# Altium PCB PCB1.pcbdoc (part 2 of 3)
Units mil, origin at the board's own origin, x right, y up, seen from the top; angles counter-clockwise.
Board outline 3735 x 4815 mil, 4 copper layers (Top Layer, Inner1, Inner2, Bottom Layer); 129 components, 135 nets, 714 pads, 315 vias.
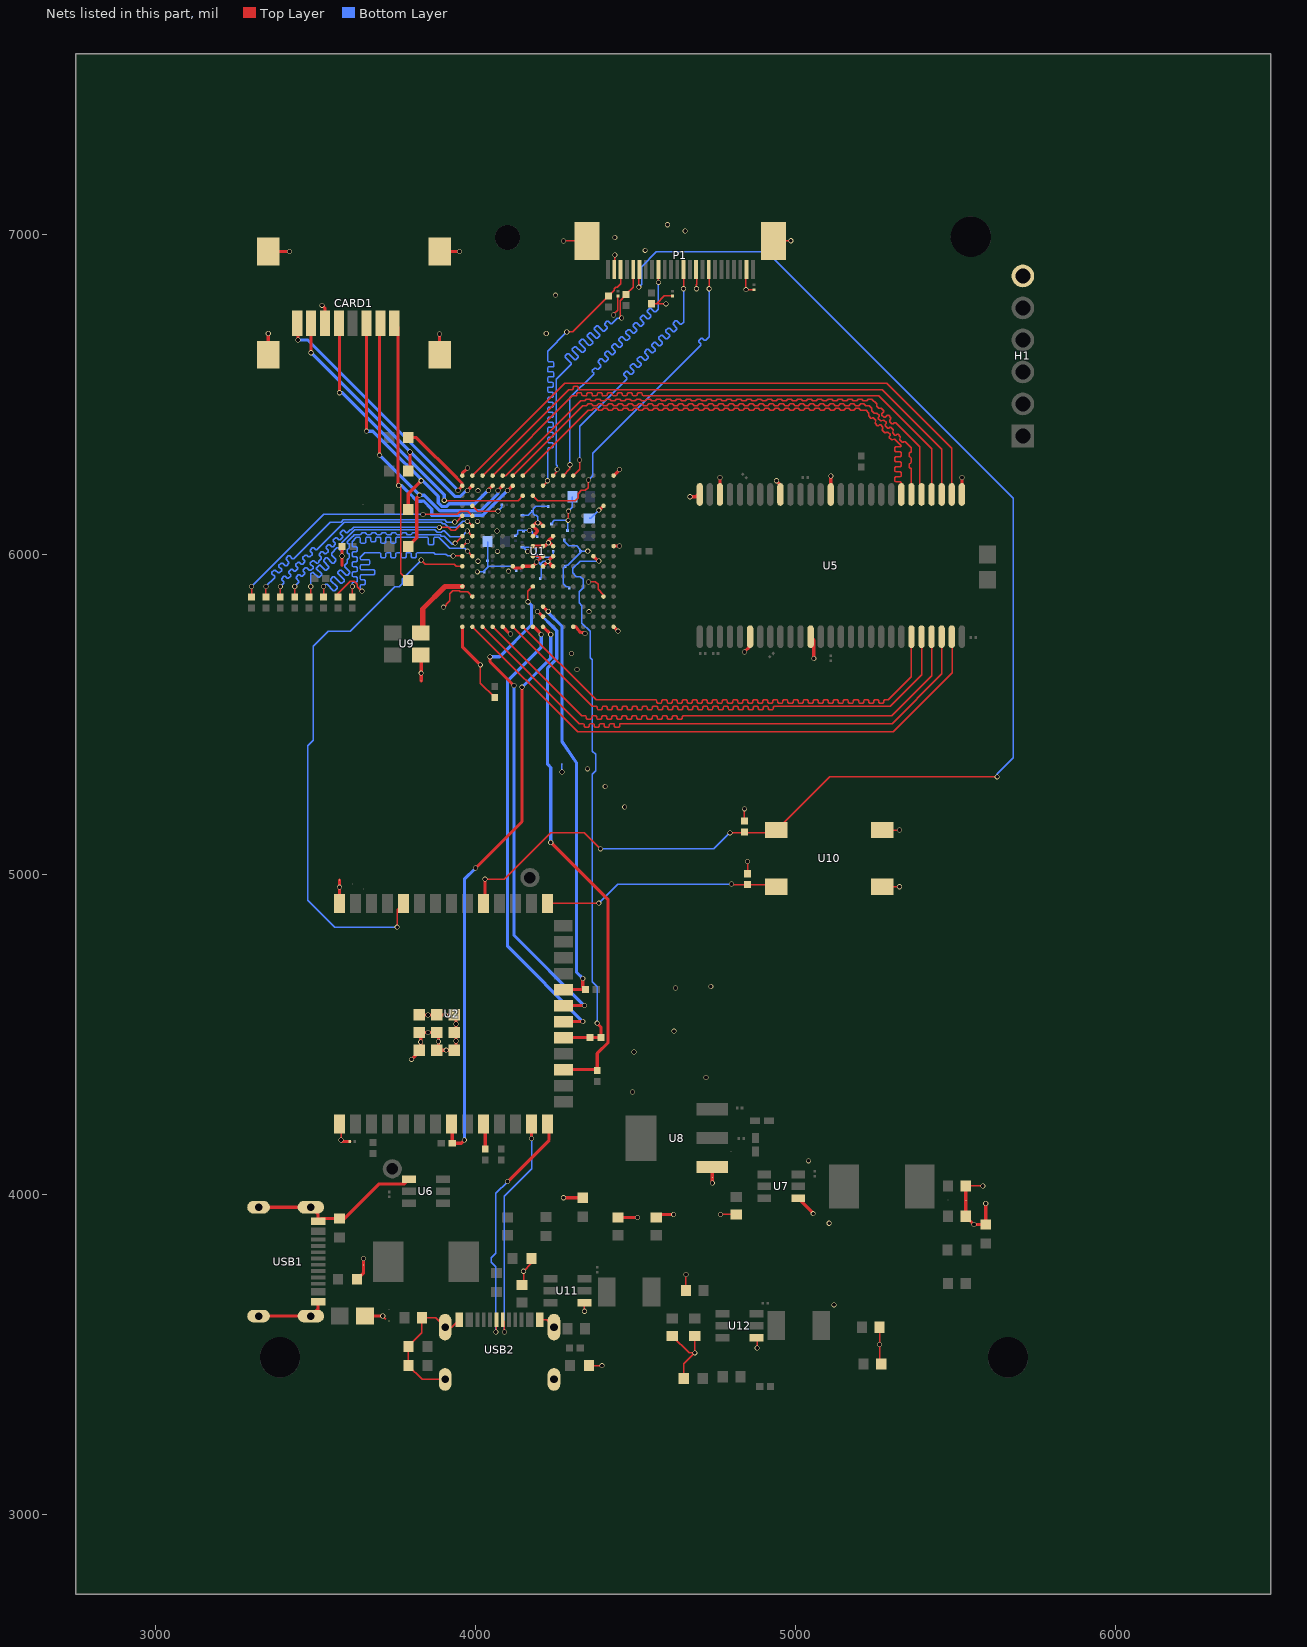
[diagram p4: the nets of this part, all layers, seen from the top]

## Via types
v1: diameter 15.75, hole 11.81, Top Layer to Bottom Layer, 309 vias
v2: diameter 39.37, hole 19.68, Top Layer to Bottom Layer, 6 vias

## Nets (pads, with @x,y where several pads share a name; then routed paths per layer and width w, separated by ;. In a path a pad name is that pad's centre, name@x,y a point inside that pad or via, vN(x,y) a via of type N, cw(c..) or ccw(c..) an arc to the next point about the centre after c; other vN are vias at no path point) (continued)
CCLK: R6.1 R6.2 U1.J14 U2.19 | length 1754.5
  Top Layer w10: U2.19@4280.19,4490 R6.1@4357.96,4490 R6.2@4392.04,4490 4392.04,4522.96 v1(4380,4535) ; U1.J14@4368.23,5994.25 4383.31,5979.17 v1(4385,5979.17)
  Bottom Layer w3.94: v1(4380,4535) 4380,4648.33 4364.17,4664.16 4364.17,5312.67 4375,5323.5 4375,5375 4365,5385 4364.17,5385 4364.17,5670.83 4358.19,5676.81 4358.19,5759.56 4332.26,5785.48 4332.26,5839.22 4323.27,5848.21 4323.27,5883.27 4335.83,5895.83 4335.83,5921.56 4326.56,5930.83 4315.31,5930.83 4304.11,5942.03 4304.11,5956.49 4326.79,5979.17 v1(4385,5979.17)
CRYSTAL: U1.M1 U9.3 | length 231
  Top Layer w15.75: U9.3@3828.31,5754.45 3835,5761.14 3835,5830 3904.76,5899.76 U1.M1@3958.78,5899.76
D0: R26.1 U1.E2 | length 827.3
  Top Layer w3.94: R26.1@3300,5867.04 v1(3300,5900) ; v1@3835,6125 3942.27,6125 3952.55,6135.28 3975.24,6135.28 U1.E2@3990.28,6120.24
  Bottom Layer w3.94: v1(3300,5900) 3525,6125 v1(3835.38,6125)
D1: R27.1 U1.E1 | length 830.3
  Top Layer w3.94: R27.1@3345,5867.04 v1(3345,5900) ; v1(3935,6101.14) 3939.68,6101.14 U1.E1@3958.78,6120.24
  Bottom Layer w3.94: v1(3345,5900) 3371.97,5926.97 3371.97,5930.91 3363.41,5939.47 3363.41,5943.41 3370.6,5950.6 3374.54,5950.6 3383.1,5942.04 3387.04,5942.04 3394.24,5949.24 3394.24,5953.18 3385.68,5961.74 3385.68,5965.68 3392.88,5972.88 3396.81,5972.88 3405.38,5964.31 3409.31,5964.31 3416.51,5971.51 3416.51,5975.45 3407.95,5984.01 3407.95,5987.95 3415.15,5995.15 3419.08,5995.15 3427.65,5986.58 3431.58,5986.58 3546.14,6101.14 3580.01,6101.14 3587.01,6108.15 3903.22,6108.15 3910.23,6101.14 v1(3935,6101.14)
D2: R28.1 U1.F2 | length 844.7
  Top Layer w3.94: R28.1@3390,5867.04 v1(3390,5900) ; v1(3974.88,6103.3) 3975.72,6103.3 U1.F2@3990.28,6088.74
  Bottom Layer w3.94: v1(3390,5900) 3400,5910 3400,5913.94 3393.94,5920 3393.94,5923.94 3401.14,5931.14 3405.07,5931.14 3411.14,5925.07 3415.07,5925.07 3422.27,5932.27 3422.27,5936.21 3416.21,5942.27 3416.21,5946.21 3423.41,5953.41 3427.34,5953.41 3433.41,5947.34 3437.34,5947.34 3444.54,5954.54 3444.54,5958.48 3438.48,5964.54 3438.48,5968.48 3445.68,5975.68 3449.61,5975.68 3455.68,5969.61 3459.61,5969.61 3466.81,5976.81 3466.81,5980.75 3460.75,5986.81 3460.75,5990.75 3467.95,5997.95 3471.89,5997.95 3477.95,5991.89 3481.89,5991.89 3489.08,5999.08 3489.08,6003.02 3483.02,6009.08 3483.02,6013.02 3490.22,6020.22 3494.16,6020.22 3500.22,6014.16 3504.16,6014.16 3590.28,6100.28 3893.32,6100.28 3897.63,6095.97 3904.27,6095.97 3914.92,6085.31 3941.56,6085.31 3959.54,6103.3 v1(3974.88,6103.3)
D3: R29.1 U1.F1 | length 814.7
  Top Layer w3.94: R29.1@3435,5867.04 v1(3435,5900) ; v1(3886.77,6084.45) 3914.31,6084.45 3923.44,6075.31 3936.56,6075.31 3950.65,6089.41 3958.11,6089.41 U1.F1@3958.78,6088.74
  Bottom Layer w3.94: v1(3435,5900) 3447.57,5912.57 3447.57,5916.51 3439.01,5925.07 3439.01,5929.01 3446.21,5936.21 3450.14,5936.21 3454.84,5931.51 3458.78,5931.51 3465.98,5938.71 3465.98,5942.64 3461.28,5947.34 3461.28,5951.28 3468.48,5958.48 3472.41,5958.48 3480.98,5949.91 3484.91,5949.91 3492.11,5957.11 3492.11,5961.05 3483.55,5969.61 3483.55,5973.55 3490.75,5980.75 3494.69,5980.75 3503.25,5972.19 3507.19,5972.19 3509.25,5974.25 3509.25,5978.05 3517.6,5986.4 3517.6,5990.33 3510.94,5997 3510.94,6000.94 3518.14,6008.14 3522.07,6008.14 3528.74,6001.47 3532.68,6001.47 3539.87,6008.67 3539.87,6012.61 3533.21,6019.27 3533.21,6023.21 3540.41,6030.41 3544.34,6030.41 3551.01,6023.74 3554.95,6023.74 3562.15,6030.94 3562.15,6034.88 3555.48,6041.54 3555.48,6045.48 3562.68,6052.68 3566.62,6052.68 3573.28,6046.01 3577.22,6046.01 3584.42,6053.21 3584.42,6057.15 3577.75,6063.81 3577.75,6067.75 3584.95,6074.95 3588.89,6074.95 3595.55,6068.28 3599.49,6068.28 3607.7,6076.5 3611.5,6076.5 3619.45,6084.45 v1(3886.77,6084.45)
D4: R30.1 U1.G2 | length 836.9
  Top Layer w3.94: R30.1@3480,5867.04 3485,5872.04 v1(3485,5900) ; v1(3974.28,6073.12) 3974.4,6073.12 U1.G2@3990.28,6057.24
  Bottom Layer w3.94: v1(3485,5900) 3485,5938.86 3490.76,5944.62 3491.47,5944.62 3507.68,5928.4 3511.62,5928.4 3518.82,5935.6 3518.82,5939.54 3502.6,5955.76 3502.6,5956.47 3513.03,5966.89 3513.74,5966.89 3529.95,5950.68 3533.89,5950.68 3541.09,5957.87 3541.09,5961.81 3524.87,5978.03 3524.87,5981.96 3532.07,5989.16 3536.01,5989.16 3552.23,5972.95 3556.16,5972.95 3563.36,5980.15 3563.36,5984.08 3550,5997.44 3550,6003.86 3566.76,6020.62 3570.7,6020.62 3579.29,6012.03 3583.23,6012.03 3590.42,6019.23 3590.42,6023.17 3581.83,6031.76 3581.83,6035.7 3622.71,6076.57 3872.26,6076.57 3880.21,6068.62 3893.32,6068.62 3898.32,6073.62 3902.59,6073.62 3920.39,6055.83 3956.99,6055.83 v1(3974.28,6073.12)
D5: R31.1 U1.G1 | length 826
  Top Layer w3.94: R31.1@3525,5867.04 v1(3525,5900) ; v1(3936.32,6035) 3936.54,6035 U1.G1@3958.78,6057.24
  Bottom Layer w3.94: v1(3525,5900) 3532.04,5907.04 3535.98,5907.04 3556.02,5887 3559.95,5887 3567.15,5894.2 3567.15,5898.13 3547.11,5918.17 3547.11,5922.11 3554.31,5929.31 3558.25,5929.31 3578.29,5909.27 3582.23,5909.27 3589.42,5916.47 3589.42,5920.4 3569.38,5940.45 3569.38,5944.38 3575.82,5950.82 3579.76,5950.82 3595.99,5934.59 3599.93,5934.59 3607.13,5941.79 3607.13,5945.73 3590.9,5961.96 3590.9,5965.9 3598.79,5973.79 3598.79,5983.93 3601.57,5986.71 3603.19,5986.71 3605.97,5989.49 3605.97,5999.67 3603.19,6002.46 3601.57,6002.46 3598.79,6005.24 3598.79,6015.42 3601.57,6018.21 3603.19,6018.21 3605.97,6020.99 3605.97,6031.17 3603.19,6033.95 3601.57,6033.95 3598.79,6036.74 3598.79,6039.63 3616.35,6057.2 3617.2,6057.2 3620.75,6060.75 3639.86,6060.75 3642.64,6063.53 3642.64,6064.76 3645.43,6067.55 3655.61,6067.55 3658.39,6064.76 3658.39,6063.53 3661.17,6060.75 3671.35,6060.75 3674.14,6063.53 3674.14,6064.76 3676.92,6067.55 3687.1,6067.55 3689.89,6064.76 3689.89,6063.53 3692.67,6060.75 3702.85,6060.75 3705.63,6063.53 3705.63,6064.76 3708.42,6067.55 3718.6,6067.55 3721.38,6064.76 3721.38,6063.53 3724.17,6060.75 3734.35,6060.75 3737.13,6063.53 3737.13,6064.76 3739.91,6067.55 3750.1,6067.55 3752.88,6064.76 3752.88,6063.53 3755.66,6060.75 3765.84,6060.75 3768.63,6063.53 3768.63,6064.76 3771.41,6067.55 3781.59,6067.55 3784.38,6064.76 3784.38,6063.53 3787.16,6060.75 3797.34,6060.75 3800.12,6063.53 3800.12,6064.76 3802.91,6067.55 3813.09,6067.55 3815.87,6064.76 3815.87,6063.53 3818.66,6060.75 3888.91,6060.75 3892.46,6057.2 3901.46,6057.2 3927.21,6031.45 3932.78,6031.45 v1(3936.32,6035)
D6: R32.1 U1.J1 | length 823.8
  Top Layer w3.94: R32.1@3570,5867.04 3570,5877.38 3608.44,5915.83 3621.56,5915.83 3630.83,5906.56 3630.83,5899.17 v1(3645,5885) ; v1(3930,5995) 3958.03,5995 U1.J1@3958.78,5994.25
  Bottom Layer w3.94: v1(3645,5885) 3639.17,5890.83 3639.17,5902.01 3641.96,5904.79 3652.36,5904.79 3655.15,5907.58 3655.15,5917.76 3652.36,5920.54 3641.96,5920.54 3639.17,5923.32 3639.17,5933.5 3641.96,5936.29 3682.22,5936.29 3685,5939.07 3685,5949.25 3682.22,5952.04 3641.96,5952.04 3639.17,5954.82 3639.17,5965 3641.96,5967.78 3667.2,5967.78 3669.99,5970.57 3669.99,5980.75 3667.2,5983.53 3641.96,5983.53 3639.17,5986.32 3639.17,5991.56 3653.44,6005.83 3701.38,6005.83 3704.16,6003.04 3704.16,5992.78 3706.94,5990 3717.12,5990 3719.91,5992.78 3719.91,6003.04 3722.69,6005.83 3732.87,6005.83 3735.66,6003.04 3735.66,5992.78 3738.44,5990 3748.62,5990 3751.4,5992.78 3751.4,6003.04 3754.19,6005.83 3764.37,6005.83 3767.15,6003.04 3767.15,5992.78 3769.94,5990 3780.12,5990 3782.9,5992.78 3782.9,6003.04 3785.68,6005.83 3795.86,6005.83 3798.65,6003.04 3798.65,5992.78 3801.43,5990 3811.61,5990 3814.4,5992.78 3814.4,6003.04 3817.18,6005.83 3869.17,6005.83 3874.17,6000.83 3906.56,6000.83 3912.38,5995 v1(3930,5995)
D7: R34.1 U1.J2 | length 826.3
  Top Layer w3.94: R34.1@3615,5867.04 v1(3615,5900) ; v1(3975,6010) 3975,6009.53 U1.J2@3990.28,5994.25
  Bottom Layer w3.94: v1(3615,5900) 3615,5910.8 3617.78,5913.58 3627.36,5913.58 3630.15,5916.36 3630.15,5926.54 3627.36,5929.33 3617.78,5929.33 3615,5932.11 3615,5942.29 3617.78,5945.08 3627.36,5945.08 3630.15,5947.86 3630.15,5958.04 3627.36,5960.82 3617.78,5960.82 3615,5963.61 3615,5973.79 3617.78,5976.57 3627.36,5976.57 3630.15,5979.36 3630.15,5989.54 3627.36,5992.32 3617.78,5992.32 3615,5995.1 3615,6005.29 3617.78,6008.07 3627.36,6008.07 3630.15,6010.85 3630.15,6021.03 3627.36,6023.82 3617.78,6023.82 3615,6026.6 3615,6040 3627.87,6052.87 3637.66,6052.87 3640.45,6050.09 3640.45,6036.77 3643.23,6033.99 3653.41,6033.99 3656.19,6036.77 3656.19,6050.09 3658.98,6052.87 3669.16,6052.87 3671.94,6050.09 3671.94,6042.34 3674.73,6039.56 3684.91,6039.56 3687.69,6042.34 3687.69,6050.09 3690.47,6052.87 3700.65,6052.87 3703.44,6050.09 3703.44,6036.77 3706.22,6033.99 3716.4,6033.99 3719.19,6036.77 3719.19,6050.09 3721.97,6052.87 3732.15,6052.87 3734.93,6050.09 3734.93,6036.77 3737.72,6033.99 3747.9,6033.99 3750.68,6036.77 3750.68,6050.09 3753.47,6052.87 3850.06,6052.87 3852.85,6050.09 3852.85,6032.78 3855.63,6030 3865.81,6030 3868.59,6032.78 3868.59,6050.09 3871.38,6052.87 3885.65,6052.87 3919.35,6019.17 3965.83,6019.17 v1(3975,6010)
DIN: U1.T8 U2.20 | length 1441.2
  Top Layer w10: U1.T8@4179.25,5773.78 4181.22,5773.78 v1(4205,5750) ; U2.20@4280.19,4540 v1(4335,4540)
  Bottom Layer w10: v1(4205,5750) 4205,5710 4100,5605 4100,4775 v1(4335,4540)
DN: U2.13 USB2.A7 | length 727.9
  Top Layer w3.94: USB2.A7@4084.84,3608.01 4090,3602.85 v1(4090,3570)
  Top Layer w10: v1(4175,4175) 4175,4215.7 U2.13@4179.81,4220.51
  Bottom Layer w3.94: v1(4090,3570) 4090,3995 4175,4080 v1(4175,4175)
DONE: pad.55@4295,5375 R3.2 U1.P9 U2.22 | length 1310.8
  Top Layer w10: U1.P9@4210.75,5836.77 4225.33,5822.19 v1(4227.19,5822.19) ; U2.22@4280.19,4640 R3.2@4342.96,4640 4335,4647.96 v1(4335,4675)
  Bottom Layer w10: v1(4227.19,5822.19) 4227.19,5817.81 4270,5775 4270,5415 4315,5350 4315,4695 v1(4335,4675)
DOUT: U1.M8 U2.21 | length 1574.2
  Top Layer w3.94: v1(4163.51,5851.94) 4163.51,5884.02 U1.M8@4179.25,5899.76
  Top Layer w10: v1(4045,5680) 4045,5665 v1(4120,5590) ; U2.21@4280.19,4590 v1(4340,4590)
  Bottom Layer w10: v1(4045,5680) 4075,5680 4174.69,5779.69 4174.69,5840.76 v1(4163.51,5851.94) ; v1(4120,5590) 4120,4810 v1(4340,4590)
DP: U2.14 USB2.A6 | length 769.2
  Top Layer w3.94: v1@4065.16,3570 USB2.A6@4065.16,3608.01
  Top Layer w10: v1(4100,4040) 4229.81,4169.81 U2.14@4229.81,4220.51
  Bottom Layer w3.94: v1(4063.27,3570) 4063.27,3774.35 4049.17,3788.44 4049.17,3801.56 4063.27,3815.65 4063.27,4003.27 v1(4100,4040)
FSCL: P1.5 R39.1 U1.A10 | length 1063.4
  Top Layer w3.94: U1.A10@4242.24,6246.22 4255,6258.98 v1(4255,6265) ; v1(4456.7,6738.3) 4451.42,6743.58 4451.42,6792.39 4470,6810.97 R39.1@4470,6812.04 4492.53,6834.57 P1.5@4492.53,6890.56
  Bottom Layer w3.94: v1(4255,6265) 4255,6276.25 4251.83,6279.42 4251.83,6546.77 4298.64,6593.59 4298.64,6597.53 4280.05,6616.11 4280.05,6620.05 4287.25,6627.25 4291.19,6627.25 4309.78,6608.66 4313.71,6608.66 4320.91,6615.86 4320.91,6619.8 4302.32,6638.39 4302.32,6642.32 4309.52,6649.52 4313.46,6649.52 4332.05,6630.93 4335.98,6630.93 4343.18,6638.13 4343.18,6642.07 4324.59,6660.66 4324.59,6664.59 4331.79,6671.79 4335.73,6671.79 4354.32,6653.2 4358.26,6653.2 4365.45,6660.4 4365.45,6664.34 4348.83,6680.96 4348.83,6684.9 4356.03,6692.1 4359.97,6692.1 4376.59,6675.47 4380.53,6675.47 4387.73,6682.67 4387.73,6686.61 4371.1,6703.23 4371.1,6707.17 4378.3,6714.37 4382.24,6714.37 4398.86,6697.75 4402.8,6697.75 4410.9,6705.84 4410.9,6709.78 4403.42,6717.26 4403.42,6721.19 4410.62,6728.39 4414.55,6728.39 4422.03,6720.92 4425.97,6720.92 4443.35,6738.3 v1(4456.7,6738.3)
FSDA: P1.3 R38.1 U1.B9 | length 1063.6
  Top Layer w3.94: U1.B9@4210.75,6214.72 4225,6228.97 v1(4225,6230) ; v1(4285,6695) 4302.96,6695 R38.1@4415,6807.04 4432.72,6824.76 4432.72,6830.11 4437.38,6834.77 4442.73,6834.77 4453.16,6845.2 P1.3@4453.16,6890.56
  Bottom Layer w3.94: v1(4225,6230) 4225,6330.57 4227.78,6333.35 4240.25,6333.35 4243.03,6336.14 4243.03,6346.32 4240.25,6349.1 4227.78,6349.1 4225,6351.88 4225,6362.48 4227.78,6365.26 4240.25,6365.26 4243.03,6368.04 4243.03,6378.22 4240.25,6381.01 4227.78,6381.01 4225,6383.79 4225,6393.97 4227.78,6396.76 4240.25,6396.76 4243.03,6399.54 4243.03,6409.72 4240.25,6412.5 4227.78,6412.5 4225,6415.29 4225,6425.47 4227.78,6428.25 4240.25,6428.25 4243.03,6431.04 4243.03,6441.22 4240.25,6444 4227.78,6444 4225,6446.78 4225,6456.96 4227.78,6459.75 4240.25,6459.75 4243.03,6462.53 4243.03,6472.71 4240.25,6475.5 4227.78,6475.5 4225,6478.28 4225,6488.46 4227.78,6491.24 4240.25,6491.24 4243.03,6494.03 4243.03,6504.21 4240.25,6506.99 4227.78,6506.99 4225,6509.78 4225,6519.96 4227.78,6522.74 4240.25,6522.74 4243.03,6525.52 4243.03,6535.7 4240.25,6538.49 4227.78,6538.49 4225,6541.27 4225,6551.45 4227.78,6554.24 4242.22,6554.24 4245,6557.02 4245,6567.2 4242.22,6569.98 4227.78,6569.98 4225,6572.77 4225,6582.95 4227.78,6585.73 4242.22,6585.73 4245,6588.52 4245,6598.7 4242.22,6601.48 4227.78,6601.48 4225,6604.26 4225,6635 v1(4285,6695)
GND: C17.1 C20.1 C22.1 C23.1 C26.1 C27.1 C28.1 C33.1 C34.2 C35.2 C37.2 C39.2 C40.2 C41.2 C42.2 C43.2 C44.2 C45.2 C46.2 C47.2 C48.2 C49.2 C50.2 C51.2 C52.2 C53.2 C54.2 C55.2 C56.2 C57.2 C58.2 C59.2 C61.2 C62.2 C63.2 C66.1 C67.1 C68.1 C71.1 C72.1 C73.1 C74.2 CARD1.6 CARD1.9 CARD1.10 CARD1.11 CARD1.12 H1.6 P1.2 P1.15 P1.23 P1.25 P1.26 pad.55@3574.8,4982.69 pad.55@3650,3780 pad.55@3730,3605 pad.55@3830,5605 pad.55@4270,5345 pad.55@4739.75,4053.61 pad.55@5531.74,3981.16 R9.1 R10.1 R12.1 R14.1 R24.1 R25.1 R35.2 R36.2 R37.2 R40.1 R42.2 R43.2 R45.1 R46.1 U1.A1 U1.A16 U1.D2 U1.D15 U1.F8 U1.F9 U1.G8 U1.G10 U1.H1 U1.H8 U1.H9 U1.H10 U1.H16 U1.J8 U1.J9 U1.J10 U1.K6 U1.K7 U1.K8 U1.K9 U1.K10 U1.N2 U1.N15 U1.T1 U1.T5 U1.T12 U1.T16 U2.1 U2.40 U2.41 U5.6 U5.12 U5.28 U5.41 U5.46 U5.52 U5.54 U6.4 U7.4 U8.1 U9.2 U10.2 U10.4 U11.4 U12.4 USB1.1 USB1.2 USB1.3 USB1.4 USB1.A1B12 USB1.B1A12 USB2.1 USB2.2 USB2.3 USB2.4 USB2.A1B12 USB2.B1A12 | length 7173.5
  Top Layer w3.94: U2.1@3574.8,4220.51 3579.8,4215.51 v1(3579.8,4170) ; v1(3710,3620) 3720,3610 ; v1(3900,5835) 3902.9,5835 3909.17,5841.27 3909.17,5844.59 3919.17,5854.59 3919.17,5876.56 3928.44,5885.83 3949.17,5885.83 3951.45,5883.55 3975,5883.55 U1.N2@3990.28,5868.27 ; USB2.3@3904.92,3421.99 3833.35,3421.99 R42.2@3790.34,3465 R43.2@3790.34,3525 3832.56,3567.22 C20.1@3832.56,3615 3875.29,3615 USB2.1@3904.92,3585.37 3926.37,3585.37 USB2.A1B12@3949.01,3608.01 ; 3965,6030 3974.52,6039.52 v1(3974.52,6040) ; U1.D2@3990.28,6151.73 4007.01,6135 4015.26,6135 4015.54,6135.28 4059.5,6135.28 4059.78,6135 v1@4070,6135 ; v1(4015,5655) 4015,5597.96 R25.1@4060,5552.96 ; C66.1@4145,3717.56 4150,3722.56 v1(4150,3760) 4174.66,3784.66 R45.1@4174.66,3800 ; U1.J8@4179.25,5994.25 U1.J9@4208.51,5994.25 ; USB2.B1A12@4200.98,3608.01 4222.44,3608.01 USB2.2@4245.08,3585.37 ; v1(4275,6979.31) P1.26@4348.62,6979.31 ; v1(4289.49,6106.37) 4290,6106.88 v1(4290,6135) ; v1(4340,3635) 4340.24,3635.24 U11.4@4340.24,3661.5 ; v1(4352.48,5913.63) 4357.96,5913.63 4359.12,5914.8 4374.46,5914.8 4383.27,5905.99 4383.27,5890.65 4399.72,5874.2 U1.N15@4399.72,5868.27 ; R40.1@4354.66,3465 v1(4395,3465) ; v1(4430.68,6748.01) 4430.68,6750.68 4443.54,6763.54 4443.54,6795.65 4445,6797.11 C34.2@4445,6807.32 ; P1.2@4433.48,6890.56 4435,6892.07 v1(4435,6935) ; R35.2@4550,6782.96 4565.64,6782.96 ; v1(4595,6782.96) 4565.64,6782.96 ; C68.1@4615,3557.44 4667.44,3505 v1(4685,3505) ; C35.2@4615,6807.32 4590,6807.32 4565.64,6782.96 ; R46.1@4650.34,3425 4650.34,3470.34 v1(4685,3505) ; C71.1@4657.44,3700 v1(4657.44,3750) ; C67.1@4685,3557.44 v1(4685,3505) ; P1.15@4689.23,6890.51 4690.68,6889.06 4690.68,6843.3 4690,6842.62 v1@4690,6830 ; v1(4765,3937.44) C26.1@4815,3937.44 ; R36.2@4840,5167.04 v1(4840,5205) ; P1.23@4846.94,6890.44 4845,6888.51 v1(4845,6827.16) 4845.16,6827.32 C74.2@4870,6827.32 ; R37.2@4850,5002.04 v1(4850,5040) ; U12.4@4878.15,3552.6 4880,3550.75 v1(4880,3520) ; P1.25@4931.38,6979.56 4984.56,6979.56 v1(4985,6980) ; C73.1@5262.56,3585 v1(5262.56,3531.01) 5262.56,3475 C72.1@5267.56,3470 ; U10.4@5270.35,4961.41 v1(5325,4961.41) ; U10.2@5270.35,5138.59 v1(5325,5138.59) ; C27.1@5531.74,4026.54 v1(5585,4026.54)
  Top Layer w10: USB1.4@3321.99,3619.92 USB1.2@3485.37,3619.92 3508.01,3642.56 USB1.B1A12@3508.01,3664.02 ; USB1.3@3321.99,3960.08 USB1.1@3485.37,3960.08 3508.01,3937.44 USB1.A1B12@3508.01,3915.99 3516.68,3924.66 R9.1@3575,3924.66 3590,3924.66 3697.74,4032.4 3765.25,4032.4 3765.65,4032.8 3777.25,4032.8 U6.4@3791.85,4047.4 ; CARD1.10@3352.28,6623.58 v1(3352.28,6690.17) ; CARD1.9@3352.28,6946.42 v1(3418.62,6946.42) ; v1(3520.5,6778.21) 3529.45,6769.26 CARD1.6@3529.45,6722.01 ; pad.55@3574.8,4982.69 v1(3574.8,4960.15) 3574.8,4914.49 U2.40@3579.8,4909.49 ; v1(3579.8,4170) 3584.8,4165 C17.1@3607.32,4165 ; 3582.96,5965 v1(3582.96,5994.74) R24.1@3582.96,6025 ; R10.1@3629.66,3735 3650,3755.34 pad.55@3650,3780 v1(3650,3800) ; C33.1@3654.37,3620 v1(3710,3620) ; v1(3800.03,4422.23) 3828.62,4450.82 v1(3828.62,4476.53) 3828.62,4505.94 v1(3851.3,4505.94) 3883.74,4505.94 v1(3883.74,4477.51) 3883.74,4450.82 v1(3908.15,4450.82) 3938.86,4450.82 v1(3938.86,4479.23) v1(3938.86,4532.88) 3938.86,4561.06 v1(3905.44,4561.06) U2.41@3878.74,4561.06 v1(3851.3,4561.06) U2.41@3828.62,4561.06 ; U9.2@3828.31,5685.55 3830,5683.86 v1(3830,5628.83) pad.55@3830,5605 ; CARD1.11@3887.72,6623.58 v1(3887.72,6688.51) ; CARD1.12@3887.72,6946.42 v1(3950,6946.42) ; U1.T1@3958.78,5773.78 3958.78,5711.22 v1(4015,5655) ; U1.A1@3958.78,6246.22 3958.78,6253.78 v1(3975,6270) ; U1.T5@4084.76,5773.78 4107.71,5750.83 v1(4109.17,5750.83) ; U1.K6@4116.26,5962.76 4121.82,5957.2 4142.2,5957.2 U1.K7@4147.76,5962.76 U1.K8@4179.25,5962.76 4190.54,5974.05 v1(4190.54,5976.28) 4208.51,5994.25 U1.J9@4210.75,5994.25 ; U1.H8@4179.25,6025.75 U1.H9@4210.75,6025.75 4216.68,6025.75 v1(4227.24,6036.31) ; U1.G8@4179.25,6057.24 4193.12,6071.11 4193.12,6074.87 U1.F8@4179.25,6088.74 4189.25,6098.74 v1(4194.63,6098.74) 4200.75,6098.74 U1.F9@4210.75,6088.74 ; U1.K9@4210.75,5962.76 4225.66,5977.67 v1(4225.66,5978.19) ; U1.K10@4236.12,5963.86 4236.12,5967.73 v1(4225.66,5978.19) ; U1.J10@4242.24,5994.25 4241.72,5994.25 v1(4225.66,5978.19) ; U1.H10@4242.24,6025.75 4231.68,6036.31 v1(4227.24,6036.31) ; U1.G10@4242.24,6057.24 4227.24,6042.24 v1(4227.24,6036.31) ; v1(4275,3989.66) R12.1@4335,3989.66 ; U1.T12@4305.24,5773.78 4312.61,5773.78 4318.66,5767.73 4318.66,5766.29 4329.24,5755.71 4339.49,5755.71 v1(4342.36,5752.84) ; v1@4385,6140 4387.99,6140 U1.D15@4399.72,6151.73 ; U1.T16@4431.22,5773.78 v1(4445,5760) ; U1.H16@4431.22,6025.75 v1(4450,6025.83) ; U1.A16@4431.22,6246.22 v1(4450,6265) ; C23.1@4445,3927.56 v1(4506.18,3927.56) ; C22.1@4565,3927.56 4574.88,3937.44 v1(4618.97,3937.44) ; v1(4670,6180) 4688.42,6180 U5.54@4700.55,6192.13 ; v1(4739.75,4035.38) pad.55@4739.75,4053.61 U8.1@4739.75,4085.59 ; U5.52@4763.54,6192.13 v1(4763.54,6240) ; v1(4840,5695) 4858.03,5713.03 U5.6@4858.03,5742.87 ; v1(4940,6230) 4952.52,6217.48 U5.46@4952.52,6187.13 ; U7.4@5008.15,3987.6 5055,3940.75 v1(5055,3940) ; U5.12@5047.01,5742.87 5057.01,5732.87 v1(5057.01,5675) ; U5.41@5110,6192.13 v1(5110,6245) ; U5.28@5519.45,6187.13 5520,6187.68 v1(5520,6240) ; C27.1@5531.74,4026.54 pad.55@5531.74,3981.16 C28.1@5531.74,3931.54 v1(5557.08,3906.2) R14.1@5594.18,3906.2 v1(5594.18,3971.54)
  Bottom Layer w3.94: v1@4005,5945 C51.2@4027.32,5945 4027.32,5949.35 4037.32,5959.35 ; C61.2@4037.44,6040 4037.44,5980.12 C56.2@4037.32,5980 4037.32,5959.35 ; v1(4069.95,6135.05) 4082.32,6147.42 C37.2@4082.32,6155 ; C41.2@4125,6057.68 4132.01,6064.69 4132.01,6074.87 4147.45,6074.87 C62.2@4150,6072.32 4152.54,6074.86 v1(4168.51,6074.86) 4172.46,6074.86 4177.29,6070.03 4177.29,6067.67 4186.56,6058.4 4188.92,6058.4 C42.2@4192.32,6055 ; C54.2@4127.32,5950 4114.48,5962.84 4040.81,5962.84 4037.32,5959.35 ; C45.2@4145,6022.32 C45.2@4149.31,6022.32 ; C63.2@4145,6122.68 4165,6122.68 C50.2@4177.32,6135 ; v1(4162.94,6008.69) C45.2@4149.31,6022.32 ; v1(4190.54,5976.28) 4196.04,5976.28 4205.59,5966.73 ; v1(4194.63,6098.74) 4194.63,6117.69 4189.6,6122.72 4185.25,6122.72 4180.59,6127.38 4180.59,6131.73 C50.2@4177.32,6135 ; C53.2@4202.32,5925 4205.59,5928.27 4205.59,5956.06 4209.53,5960 C49.2@4212.32,5960 4205.59,5966.73 ; C39.2@4227.32,6150 4187.97,6150 4180.59,6142.62 4180.59,6138.27 C50.2@4177.32,6135 ; C43.2@4237.32,6095 4240.59,6098.27 4240.59,6102.62 4245.25,6107.28 4260.11,6107.28 4261.02,6106.37 v1(4289.49,6106.37) 4287.32,6104.2 C40.2@4287.32,6075 ; C47.2@4242.68,6010 4242.68,5995.21 4238.73,5991.27 ; v1(4270,5320) pad.55@4270,5345 ; C44.2@4277.32,6045 4277.32,6040.65 4291.75,6026.22 4315.81,6026.22 4327.68,6014.35 C55.2@4327.68,6010 ; v1(4290,6135) 4302.44,6147.44 C58.2@4302.44,6180 ; C48.2@4292.32,5895 4288.15,5899.17 4283.44,5899.17 4274.17,5908.44 4274.17,5956.49 C52.2@4280,5962.32 4283.27,5965.59 4287.62,5965.59 4327.68,6005.65 C55.2@4327.68,6010 ; v1@4350,6010 C55.2@4327.68,6010 ; C59.2@4355,6112.56 4359.43,6112.56 v1(4385,6138.13) ; C45.2@4149.31,6022.32 4185,6022.32 C46.2@4187.32,6020 4189.41,6017.91 4189.41,5998.27 C57.2@4192.68,5995 4196.41,5991.27 4238.73,5991.27 ; 4205.59,5966.73 4205.59,5972.29 4211.49,5978.19 v1(4225.66,5978.19) 4238.73,5991.27
  other v1: 5120,3655 5105,3910 5040,4105 4490,4320 4720,4365 4495,4445 4620,4510 4625,4645 4735,4650 4465.89,5210.89 4405,5275 4350,5330 4317.2,5640 4300,5690 4354.23,5820.86 4005.58,5945.58 4102.98,5947.46 4007.96,5978.48 4068.51,6009.5 4350.6,6010 4067.07,6072.96 4006.09,6103.3 4007.97,6198.94 4220.83,6690 4250,6810 4690.68,6830 4530,6950 4435,6990 4655,7010 4600,7030
HREF: P1.9 U1.A11 | length 1063.9
  Top Layer w3.94: U1.A11@4273.74,6246.22 4295,6267.48 v1(4295,6280) ; v1(4571.27,6850) P1.9@4571.27,6890.56
  Bottom Layer w3.94: v1(4295,6280) 4295,6490 4368.56,6563.56 4368.56,6567.5 4365,6571.06 4365,6575 4372.19,6582.19 4376.13,6582.19 4379.69,6578.63 4383.63,6578.63 4391.94,6586.94 4391.94,6590.88 4382.85,6599.98 4382.85,6603.91 4390.05,6611.11 4393.99,6611.11 4403.08,6602.02 4407.02,6602.02 4414.22,6609.22 4414.22,6613.15 4403.15,6624.22 4403.15,6628.15 4410.35,6635.35 4414.29,6635.35 4425.35,6624.29 4429.29,6624.29 4436.49,6631.49 4436.49,6635.42 4425.42,6646.49 4425.42,6650.42 4432.62,6657.62 4436.56,6657.62 4447.62,6646.56 4451.56,6646.56 4458.76,6653.76 4458.76,6657.69 4447.69,6668.76 4447.69,6672.69 4454.89,6679.89 4458.83,6679.89 4469.89,6668.83 4473.83,6668.83 4481.03,6676.03 4481.03,6679.97 4469.97,6691.03 4469.97,6694.97 4477.16,6702.16 4481.1,6702.16 4492.16,6691.1 4496.1,6691.1 4503.3,6698.3 4503.3,6702.24 4492.24,6713.3 4492.24,6717.24 4499.44,6724.44 4503.37,6724.44 4514.44,6713.37 4518.37,6713.37 4525.57,6720.57 4525.57,6724.51 4514.51,6735.57 4514.51,6739.51 4521.71,6746.71 4525.64,6746.71 4536.71,6735.64 4540.64,6735.64 4547.84,6742.84 4547.84,6746.78 4536.78,6757.84 4536.78,6761.78 4543.98,6768.98 4547.91,6768.98 4558.98,6757.91 4562.91,6757.91 4571.27,6766.27 v1(4571.27,6850)
INITN: pad.55@3965,4985 R5.1 U1.T9 U2.8 | length 1829.7
  Top Layer w10: U2.8@3929.8,4220.51 3927.04,4217.74 R5.1@3927.04,4160 3955,4160 v1(3965,4170) ; v1(4000,5020) 4145,5165 v1(4145,5585) ; U1.T9@4210.75,5773.78 4234.53,5750 v1(4235,5750)
  Bottom Layer w10: v1(3965,4170) pad.55@3965,4985 v1(4000,5020) ; v1(4145,5585) 4235,5675 v1(4235,5750)
M_CLK: CARD1.5 U1.C7 | length 946.6
  Top Layer w3.94: v1(3902.16,6168.89) 3902.85,6168.19 4132.72,6168.19 U1.C7@4147.76,6183.23
  Top Layer w10: CARD1.5@3572.76,6722.01 3575,6719.77 v1(3575,6505)
  Bottom Layer w10: v1(3575,6505) 3583.33,6505 3902.16,6186.17 v1(3902.16,6168.89)
M_CMD: CARD1.3 R20.1 U1.B4 | length 974.3
  Top Layer w10: v1(3659.38,6385) CARD1.3@3659.38,6722.01 ; R20.1@3789.66,6140 3789.66,6189.66 v1(3830,6230) ; v1(4040,6200) 4040,6201.45 U1.B4@4053.27,6214.72
  Bottom Layer w10: v1(3659.38,6385) 3679.38,6385 3883.3,6181.08 3883.3,6161.08 3894.34,6150.03 3909.97,6150.03 3917.81,6157.87 3997.87,6157.87 v1(4040,6200)
M_D0: CARD1.7 R18.1 U1.B2 | length 858.2
  Top Layer w10: v1(3486.14,6630) CARD1.7@3486.14,6722.01 ; R18.1@3789.66,6260 3795,6265.34 v1(3795,6320) ; v1(3975,6200) 3975.56,6200 U1.B2@3990.28,6214.72
  Bottom Layer w10: v1(3486.14,6630) 3935,6181.14 3952.81,6181.14 3971.67,6200 v1(3975,6200)
M_D1: CARD1.8 R19.1 U1.B1 | length 1003.9
  Top Layer w10: CARD1.8@3442.84,6722.01 3445,6719.85 v1(3445,6670) ; R19.1@3789.66,6365 3814.66,6365 3940.71,6238.95 3940.71,6238.73 3951.29,6228.15 3951.51,6228.15 3957.5,6222.16 U1.B1@3957.5,6213.44 ; v1(3945,6200) 3945,6200.94 U1.B1@3957.5,6213.44 ; U1.B1@3958.78,6214.72 U1.B1@3957.5,6213.44
  Bottom Layer w10: v1(3445,6670) 3475,6670 v1(3945,6200)
M_D2: CARD1.1 R16.1 U1.B6 | length 1267.9
  Top Layer w3.94: v1(3760,6215) 3765.83,6209.17 3765.83,5941.65 R16.1@3789.5,5917.97
  Top Layer w10: CARD1.1@3745.99,6722.01 3757.2,6710.8 3757.2,6217.8 v1(3760,6215) ; v1(4100,6200) 4101.54,6200 U1.B6@4116.26,6214.72
  Bottom Layer w10: v1(3760,6215) 3770,6215 3806.14,6178.86 3806.14,6177.19 3817.19,6166.14 3832.81,6166.14 3833.35,6166.68 3838.27,6166.68 3863.33,6141.62 3863.33,6122.16 4022.16,6122.16 v1(4100,6200)
M_D3: CARD1.2 R17.1 U1.B5 | length 1083.1
  Top Layer w10: v1(3700,6310) 3700,6719.34 CARD1.2@3702.68,6722.01 ; R17.1@3789.66,6025 3816.52,6051.86 3816.52,6176.52 v1(3825,6185) ; v1(4070,6200) U1.B5@4084.76,6214.72
  Bottom Layer w10: v1(3700,6310) v1(3825,6185) 3839.67,6185 3888.57,6136.09 4016.38,6136.09 4070,6189.71 v1(4070,6200)
MCLK: P1.13 U1.A12 | length 1068.8
  Top Layer w3.94: U1.A12@4305.24,6246.22 4325,6265.98 v1(4325,6295) ; v1(4650.02,6830) P1.13@4650.02,6890.56
  Bottom Layer w3.94: v1(4325,6295) 4325,6400 4472.44,6547.44 4472.44,6551.38 4463.35,6560.47 4463.35,6564.41 4470.55,6571.61 4474.48,6571.61 4483.58,6562.51 4487.51,6562.51 4494.71,6569.71 4494.71,6573.65 4483.65,6584.71 4483.65,6588.65 4490.85,6595.85 4494.79,6595.85 4505.85,6584.79 4509.79,6584.79 4516.98,6591.98 4516.98,6595.92 4505.92,6606.98 4505.92,6610.92 4513.12,6618.12 4517.06,6618.12 4528.12,6607.06 4532.06,6607.06 4539.25,6614.25 4539.25,6618.19 4528.19,6629.25 4528.19,6633.19 4535.39,6640.39 4539.33,6640.39 4550.39,6629.33 4554.33,6629.33 4561.53,6636.53 4561.53,6640.46 4550.46,6651.53 4550.46,6655.46 4557.66,6662.66 4561.6,6662.66 4572.66,6651.6 4576.6,6651.6 4583.8,6658.8 4583.8,6662.73 4572.73,6673.8 4572.73,6677.73 4579.93,6684.93 4583.87,6684.93 4594.93,6673.87 4598.87,6673.87 4606.07,6681.07 4606.07,6685.01 4595.01,6696.07 4595.01,6700.01 4602.2,6707.2 4606.14,6707.2 4617.2,6696.14 4621.14,6696.14 4628.34,6703.34 4628.34,6707.28 4617.28,6718.34 4617.28,6722.28 4624.47,6729.47 4628.41,6729.47 4639.47,6718.41 4643.41,6718.41 4650.02,6725.02 v1(4650.02,6830)
PCLK: P1.17 U1.C8 | length 1063.8
  Top Layer w3.94: U1.C8@4179.25,6183.23 4194.29,6168.19 4311.47,6168.19 4320.28,6177 4320.28,6189.46 4330.5,6199.68 4342.96,6199.68 4351.77,6208.49 4351.77,6220.95 4352.48,6221.66 v1(4352.48,6232.35) ; P1.17@4728.74,6890.58 4730,6889.32 v1(4730,6830)
  Bottom Layer w3.94: v1(4352.48,6232.35) 4365.83,6245.7 4365.83,6315.83 4704,6654 4704,6657.94 4697.94,6664 4697.94,6667.94 4705.13,6675.13 4709.07,6675.13 4715.13,6669.07 4719.07,6669.07 4730,6680 v1(4730,6830)
PROGRAM: R37.1 U2.27 U10.3 | length 743.5
  Top Layer w3.94: U2.27@4224.81,4909.49 4384.49,4909.49 v1(4385,4910) ; v1(4800,4970) 4802.04,4967.96 R37.1@4850,4967.96 4933.1,4967.96 U10.3@4939.65,4961.41
  Bottom Layer w3.94: v1(4385,4910) 4445,4970 v1(4800,4970)
PROGRAMN: pad.55@4225,5344.16 R4.2 U1.R9 U2.17 | length 1688.8
  Top Layer w10: v1(4193.55,5821.45) 4194.58,5821.45 U1.R9@4210.75,5805.28 ; v1(4235,5100) 4414.16,4920.84 4414.16,4474.82 4380,4440.66 R4.2@4380,4387.04 4377.04,4390 U2.17@4280.19,4390
  Bottom Layer w10: v1(4193.55,5821.45) 4253.86,5761.14 4253.86,5674.15 4225,5645.29 pad.55@4225,5344.16 4235,5334.16 v1(4235,5100)
RESET: P1.6 R36.1 U2.31 U10.1 | length 4363.6
  Top Layer w3.94: v1(4029.8,4985) 4090,4985 4235,5130 4340,5130 v1(4390,5080) ; v1(4510,6835) 4510,6888.34 P1.6@4512.23,6890.56 ; v1(4795,5130) 4931.06,5130 U10.1@4939.65,5138.59 5106.06,5305 v1(5630,5305)
  Top Layer w10: U2.31@4029.8,4909.49 v1(4029.8,4985)
  Bottom Layer w3.94: v1(4390,5080) 4745,5080 v1(4795,5130) ; v1(4510,6835) 4518.9,6843.9 4518.9,6898.9 4565,6945 4910,6945 5680,6175 5680,5365 5630,5315 v1(5630,5305)
RX: U1.K1 U2.36 | length 1792.2
  Top Layer w3.94: v1(3755,4835) 3755,4889.69 U2.36@3774.8,4909.49 ; v1(3830.05,5982.17) 3842.95,5969.27 3933.45,5969.27 3939.96,5962.76 U1.K1@3958.78,5962.76
  Bottom Layer w3.94: v1(3755,4835) 3560,4835 3475,4920 3475,5401.42 3492.31,5418.73 3492.31,5712.31 3540,5760 3607.88,5760 3747.06,5899.17 3761.56,5899.17 3770.83,5908.44 3770.83,5922.94 v1(3830.05,5982.17)
SCL: R21.1 U2.10 | length 75.6
  Top Layer w10: U2.10@4029.8,4220.51 4030,4220.31 R21.1@4030,4145
SD_A0: U1.T6 U5.23 | length 1783
  Top Layer w3.94: U1.T6@4116.26,5773.78 4365.04,5525 4376.85,5525 4379.63,5522.22 4379.63,5517.78 4382.42,5515 4392.6,5515 4395.38,5517.78 4395.38,5522.22 4398.17,5525 4408.35,5525 4411.13,5522.22 4411.13,5517.78 4413.91,5515 4424.1,5515 4426.88,5517.78 4426.88,5522.22 4429.66,5525 4439.84,5525 4442.63,5522.22 4442.63,5517.78 4445.41,5515 4455.59,5515 4458.38,5517.78 4458.38,5522.22 4461.16,5525 4471.34,5525 4474.12,5522.22 4474.12,5517.78 4476.91,5515 4487.09,5515 4489.87,5517.78 4489.87,5522.22 4492.65,5525 4502.84,5525 4505.62,5522.22 4505.62,5517.78 4508.4,5515 4518.58,5515 4521.37,5517.78 4521.37,5522.22 4524.15,5525 4534.33,5525 4537.12,5522.22 4537.12,5517.78 4539.9,5515 4550.08,5515 4552.86,5517.78 4552.86,5522.22 4555.65,5525 4565.83,5525 4568.61,5522.22 4568.61,5517.78 4571.4,5515 4581.58,5515 4584.36,5517.78 4584.36,5522.22 4587.14,5525 4597.32,5525 4600.11,5522.22 4600.11,5517.78 4602.89,5515 4613.07,5515 4615.86,5517.78 4615.86,5522.22 4618.64,5525 4628.82,5525 4631.6,5522.22 4631.6,5517.78 4634.39,5515 4644.57,5515 4647.35,5517.78 4647.35,5522.22 4650.14,5525 4660.32,5525 4663.1,5522.22 4663.1,5517.78 4665.88,5515 4676.06,5515 4678.85,5517.78 4678.85,5522.22 4681.63,5525 4691.81,5525 4694.6,5522.22 4694.6,5517.78 4697.38,5515 4707.56,5515 4710.34,5517.78 4710.34,5522.22 4713.13,5525 4723.31,5525 4726.09,5522.22 4726.09,5517.78 4728.88,5515 4739.06,5515 4741.84,5517.78 4741.84,5522.22 4744.62,5525 4754.8,5525 4757.59,5522.22 4757.59,5517.78 4760.37,5515 4770.55,5515 4773.34,5517.78 4773.34,5522.22 4776.12,5525 4786.3,5525 4789.08,5522.22 4789.08,5517.78 4791.87,5515 4802.05,5515 4804.83,5517.78 4804.83,5522.22 4807.62,5525 4817.8,5525 4820.58,5522.22 4820.58,5517.78 4823.36,5515 4833.54,5515 4836.33,5517.78 4836.33,5522.22 4839.11,5525 4849.29,5525 4852.08,5522.22 4852.08,5517.78 4854.86,5515 4865.04,5515 4867.82,5517.78 4867.82,5522.22 4870.61,5525 4880.79,5525 4883.57,5522.22 4883.57,5517.78 4886.36,5515 4896.54,5515 4899.32,5517.78 4899.32,5522.22 4902.1,5525 4912.28,5525 4915.07,5522.22 4915.07,5517.78 4917.85,5515 4928.03,5515 4930.82,5517.78 4930.82,5522.22 4933.6,5525 5295,5525 5393.47,5623.47 U5.23@5393.47,5742.87
SD_A1: U1.T4 U5.24 | length 1796.6
  Top Layer w3.94: U1.T4@4053.27,5773.78 4332.05,5495 4343.86,5495 4346.64,5492.22 4346.64,5487.78 4349.43,5485 4359.61,5485 4362.39,5487.78 4362.39,5492.22 4365.18,5495 4375.36,5495 4378.14,5492.22 4378.14,5487.78 4380.92,5485 4391.11,5485 4393.89,5487.78 4393.89,5492.22 4396.67,5495 4406.85,5495 4409.64,5492.22 4409.64,5487.78 4412.42,5485 4422.6,5485 4425.39,5487.78 4425.39,5492.22 4428.17,5495 4438.35,5495 4441.13,5492.22 4441.13,5487.78 4443.92,5485 4454.1,5485 4456.88,5487.78 4456.88,5492.22 4459.66,5495 4469.85,5495 4472.63,5492.22 4472.63,5487.78 4475.41,5485 4485.59,5485 4488.38,5487.78 4488.38,5492.22 4491.16,5495 4501.34,5495 4504.13,5492.22 4504.13,5487.78 4506.91,5485 4517.09,5485 4519.87,5487.78 4519.87,5492.22 4522.66,5495 4532.84,5495 4535.62,5492.22 4535.62,5487.78 4538.41,5485 4548.59,5485 4551.37,5487.78 4551.37,5492.22 4554.15,5495 4564.33,5495 4567.12,5492.22 4567.12,5487.78 4569.9,5485 4580.08,5485 4582.87,5487.78 4582.87,5492.22 4585.65,5495 4595.83,5495 4598.61,5492.22 4598.61,5487.78 4601.4,5485 4611.58,5485 4614.36,5487.78 4614.36,5492.22 4617.15,5495 4627.33,5495 4630.11,5492.22 4630.11,5487.78 4632.89,5485 4643.07,5485 4645.86,5487.78 4645.86,5492.22 4648.64,5495 5300,5495 5425,5620 U5.24@5425,5742.83
SD_A2: U1.T3 U5.25 | length 1806.1
  Top Layer w3.94: U1.T3@4021.77,5773.78 4324.09,5471.46 4336.81,5471.46 4339.59,5468.68 4339.59,5462.78 4342.38,5460 4352.56,5460 4355.34,5462.78 4355.34,5468.68 4358.13,5471.46 4368.31,5471.46 4371.09,5468.68 4371.09,5462.78 4373.87,5460 4384.06,5460 4386.84,5462.78 4386.84,5468.68 4389.62,5471.46 4399.8,5471.46 4402.59,5468.68 4402.59,5462.78 4405.37,5460 4415.55,5460 4418.34,5462.78 4418.34,5468.68 4421.12,5471.46 4431.3,5471.46 4434.08,5468.68 4434.08,5462.78 4436.87,5460 4447.05,5460 4449.83,5462.78 4449.83,5468.68 4452.61,5471.46 5301.46,5471.46 5456.46,5626.46 U5.25@5456.46,5742.87
SD_A3: U1.T2 U5.26 | length 1826.3
  Top Layer w3.94: U1.T2@3990.28,5773.78 4319.06,5445 5305,5445 5490,5630 5490,5740.82 U5.26@5487.95,5742.87
SD_A4: U1.A2 U5.29 | length 1846.3
  Top Layer w3.94: U1.A2@3990.28,6246.22 4279.06,6535 5285,6535 5487.95,6332.05 U5.29@5487.95,6187.13
SD_A5: U1.A3 U5.30 | length 1778.1
  Top Layer w3.94: U1.A3@4021.77,6246.22 4290.55,6515 4302.36,6515 4305.14,6517.78 4305.14,6522.22 4307.93,6525 4318.11,6525 4320.89,6522.22 4320.89,6517.78 4323.68,6515 5270,6515 5456.46,6328.54 U5.30@5456.46,6187.13
SD_A6: U1.A4 U5.31 | length 1780.3
  Top Layer w3.94: U1.A4@4053.27,6246.22 4302.05,6495 4313.86,6495 4316.64,6497.78 4316.64,6502.22 4319.43,6505 4329.61,6505 4332.39,6502.22 4332.39,6497.78 4335.18,6495 4345.36,6495 4348.14,6497.78 4348.14,6502.22 4350.92,6505 4361.11,6505 4363.89,6502.22 4363.89,6497.78 4366.67,6495 4376.85,6495 4379.64,6497.78 4379.64,6502.22 4382.42,6505 4392.6,6505 4395.39,6502.22 4395.39,6497.78 4398.17,6495 4408.35,6495 4411.13,6497.78 4411.13,6502.22 4413.92,6505 4424.1,6505 4426.88,6502.22 4426.88,6497.78 4429.66,6495 4439.85,6495 4442.63,6497.78 4442.63,6502.22 4445.41,6505 4455.59,6505 4458.38,6502.22 4458.38,6497.78 4461.16,6495 4471.34,6495 4474.13,6497.78 4474.13,6502.22 4476.91,6505 4487.09,6505 4489.87,6502.22 4489.87,6497.78 4492.66,6495 4502.84,6495 4505.62,6497.78 4505.62,6502.22 4508.41,6505 4518.59,6505 4521.37,6502.22 4521.37,6497.78 4524.15,6495 5260,6495 5424.96,6330.04 U5.31@5424.96,6187.13
SD_A7: U1.A5 U5.32 | length 1774.3
  Top Layer w3.94: U1.A5@4084.76,6246.22 4094.99,6246.22 4328.77,6480 4340.58,6480 4345.58,6485 4356.33,6485 4361.33,6480 4372.08,6480 4377.08,6485 4387.83,6485 4392.83,6480 4403.57,6480 4408.57,6485 4419.32,6485 4424.32,6480 4435.07,6480 4440.07,6485 4450.82,6485 4455.82,6480 4466.57,6480 4471.57,6485 4482.31,6485 4487.31,6480 4498.06,6480 4503.06,6485 4513.81,6485 4518.81,6480 4529.56,6480 4534.56,6485 4545.31,6485 4550.31,6480 4561.05,6480 4566.05,6485 4576.8,6485 4581.8,6480 4592.55,6480 4597.55,6485 4608.3,6485 4613.3,6480 4624.05,6480 4629.05,6485 4639.79,6485 4644.79,6480 4655.54,6480 4660.54,6485 4671.29,6485 4676.29,6480 4687.04,6480 4692.04,6485 4702.79,6485 4707.79,6480 4718.53,6480 4723.53,6485 4734.28,6485 4739.28,6480 4750.03,6480 4755.03,6485 4765.78,6485 4770.78,6480 4781.53,6480 4786.53,6485 4797.28,6485 4802.28,6480 4813.02,6480 4818.02,6485 4828.77,6485 4833.77,6480 4844.52,6480 4849.52,6485 4860.27,6485 4865.27,6480 4876.02,6480 4881.02,6485 4891.76,6485 4896.76,6480 4907.51,6480 4912.51,6485 4923.26,6485 4928.26,6480 4939.01,6480 4944.01,6485 4954.76,6485 4959.76,6480 4970.5,6480 4975.5,6485 4986.25,6485 4991.25,6480 5002,6480 5007,6485 5017.75,6485 5022.75,6480 5033.5,6480 5038.5,6485 5049.24,6485 5054.24,6480 5064.99,6480 5069.99,6485 5080.74,6485 5085.74,6480 5096.49,6480 5101.49,6485 5112.24,6485 5117.24,6480 5127.98,6480 5132.98,6485 5143.73,6485 5148.73,6480 5159.48,6480 5164.48,6485 5175.23,6485 5180.23,6480 5190.98,6480 5195.98,6485 5206.72,6485 5211.72,6480 5222.47,6480 5227.47,6485 5238.22,6485 5252.87,6470.35 5252.87,6463.3 5260.07,6456.1 5264.01,6456.1 5264.49,6456.58 5268.42,6456.58 5275.62,6449.38 5275.62,6445.44 5269.55,6439.37 5269.55,6435.43 5276.75,6428.23 5280.69,6428.23 5286.76,6434.3 5290.7,6434.3 5297.89,6427.11 5297.89,6423.17 5293.73,6419.01 5293.73,6415.07 5300.93,6407.87 5304.87,6407.87 5309.03,6412.03 5312.97,6412.03 5388.47,6336.53 5388.47,6192.13 U5.32@5393.47,6187.13
SD_A8: U1.A6 U5.33 | length 1748.8
  Top Layer w3.94: U1.A6@4116.26,6246.22 4335.04,6465 4346.85,6465 4349.63,6467.78 4349.63,6468.19 4352.42,6470.97 4362.6,6470.97 4365.38,6468.19 4365.38,6467.78 4368.17,6465 4378.35,6465 4381.13,6467.78 4381.13,6468.19 4383.91,6470.97 4394.1,6470.97 4396.88,6468.19 4396.88,6467.78 4399.66,6465 4409.84,6465 4412.63,6467.78 4412.63,6468.19 4415.41,6470.97 4425.59,6470.97 4428.38,6468.19 4428.38,6467.78 4431.16,6465 4441.34,6465 4444.12,6467.78 4444.12,6468.19 4446.91,6470.97 4457.09,6470.97 4459.87,6468.19 4459.87,6467.78 4462.65,6465 4472.84,6465 4475.62,6467.78 4475.62,6468.19 4478.4,6470.97 4488.58,6470.97 4491.37,6468.19 4491.37,6467.78 4494.15,6465 4504.33,6465 4507.12,6467.78 4507.12,6468.19 4509.9,6470.97 4520.08,6470.97 4522.86,6468.19 4522.86,6467.78 4525.65,6465 4535.83,6465 4538.61,6467.78 4538.61,6468.19 4541.4,6470.97 4551.58,6470.97 4554.36,6468.19 4554.36,6467.78 4557.14,6465 4567.32,6465 4570.11,6467.78 4570.11,6468.19 4572.89,6470.97 4583.07,6470.97 4585.86,6468.19 4585.86,6467.78 4588.64,6465 4598.82,6465 4601.6,6467.78 4601.6,6468.19 4604.39,6470.97 4614.57,6470.97 4617.35,6468.19 4617.35,6467.78 4620.14,6465 4630.32,6465 4633.1,6467.78 4633.1,6468.19 4635.88,6470.97 4646.06,6470.97 4648.85,6468.19 4648.85,6467.78 4651.63,6465 4661.81,6465 4664.6,6467.78 4664.6,6468.19 4667.38,6470.97 4677.56,6470.97 4680.34,6468.19 4680.34,6467.78 4683.13,6465 4693.31,6465 4696.09,6467.78 4696.09,6468.19 4698.88,6470.97 4709.06,6470.97 4711.84,6468.19 4711.84,6467.78 4714.62,6465 4724.8,6465 4727.59,6467.78 4727.59,6468.19 4730.37,6470.97 4740.55,6470.97 4743.34,6468.19 4743.34,6467.78 4746.12,6465 4756.3,6465 4759.08,6467.78 4759.08,6468.19 4761.87,6470.97 4772.05,6470.97 4774.83,6468.19 4774.83,6467.78 4777.62,6465 4787.8,6465 4790.58,6467.78 4790.58,6468.19 4793.36,6470.97 4803.54,6470.97 4806.33,6468.19 4806.33,6467.78 4809.11,6465 4819.29,6465 4822.08,6467.78 4822.08,6468.19 4824.86,6470.97 4835.04,6470.97 4837.82,6468.19 4837.82,6467.78 4840.61,6465 4850.79,6465 4853.57,6467.78 4853.57,6468.19 4856.36,6470.97 4866.54,6470.97 4869.32,6468.19 4869.32,6467.78 4872.1,6465 4882.28,6465 4885.07,6467.78 4885.07,6468.19 4887.85,6470.97 4898.03,6470.97 4900.82,6468.19 4900.82,6467.78 4903.6,6465 4913.78,6465 4916.56,6467.78 4916.56,6468.19 4919.35,6470.97 4929.53,6470.97 4932.31,6468.19 4932.31,6467.78 4935.1,6465 4945.28,6465 4948.06,6467.78 4948.06,6468.19 4950.84,6470.97 4961.02,6470.97 4963.81,6468.19 4963.81,6467.78 4966.59,6465 4976.77,6465 4979.56,6467.78 4979.56,6468.19 4982.34,6470.97 4992.52,6470.97 4995.3,6468.19 4995.3,6467.78 4998.09,6465 5008.27,6465 5011.05,6467.78 5011.05,6468.19 5013.84,6470.97 5024.02,6470.97 5026.8,6468.19 5026.8,6467.78 5029.58,6465 5039.76,6465 5042.55,6467.78 5042.55,6468.19 5045.33,6470.97 5055.51,6470.97 5058.3,6468.19 5058.3,6467.78 5061.08,6465 5071.26,6465 5074.04,6467.78 5074.04,6468.19 5076.83,6470.97 5087.01,6470.97 5089.79,6468.19 5089.79,6467.78 5092.58,6465 5102.76,6465 5105.54,6467.78 5105.54,6468.19 5108.32,6470.97 5118.5,6470.97 5121.29,6468.19 5121.29,6467.78 5124.07,6465 5134.25,6465 5137.04,6467.78 5137.04,6468.19 5139.82,6470.97 5150,6470.97 5152.78,6468.19 5152.78,6467.78 5155.57,6465 5165.75,6465 5168.53,6467.78 5168.53,6468.19 5171.32,6470.97 5181.5,6470.97 5184.28,6468.19 5184.28,6467.78 5187.06,6465 5197.24,6465 5200.03,6467.78 5200.03,6468.19 5202.81,6470.97 5212.99,6470.97 5215.78,6468.19 5215.78,6467.78 5218.56,6465 5230,6465 5238.35,6456.65 5238.35,6452.71 5237.87,6452.23 5237.87,6448.3 5245.07,6441.1 5249.01,6441.1 5249.49,6441.58 5253.42,6441.58 5260.62,6434.38 5260.62,6430.44 5258.44,6428.26 5258.44,6424.32 5265.64,6417.12 5269.58,6417.12 5271.76,6419.3 5275.7,6419.3 5282.89,6412.11 5282.89,6408.17 5280.71,6405.99 5280.71,6402.05 5287.91,6394.85 5291.85,6394.85 5294.03,6397.03 5297.97,6397.03 5305.16,6389.84 5305.16,6385.9 5302.98,6383.72 5302.98,6379.78 5310.18,6372.58 5314.12,6372.58 5316.3,6374.76 5320.24,6374.76 5327.44,6367.56 5327.44,6363.63 5325.6,6361.79 5325.6,6357.86 5332.8,6350.66 5336.74,6350.66 5338.57,6352.49 5342.51,6352.49 5361.97,6333.03 5361.97,6321.22 5359.19,6318.44 5358.51,6318.44 5355.73,6315.65 5355.73,6305.47 5358.51,6302.69 5359.19,6302.69 5361.97,6299.9 5361.97,6288.09 5359.19,6285.31 5358.51,6285.31 5355.73,6282.52 5355.73,6272.34 5358.51,6269.56 5359.19,6269.56 5361.97,6266.78 U5.33@5361.97,6187.13
SD_A9: U1.A7 U5.34 | length 1787.7
  Top Layer w3.94: U1.A7@4147.76,6246.22 4351.54,6450 4363.35,6450 4366.13,6452.78 4366.13,6453.19 4368.92,6455.97 4379.1,6455.97 4381.88,6453.19 4381.88,6452.78 4384.67,6450 4394.85,6450 4397.63,6452.78 4397.63,6453.19 4400.41,6455.97 4410.6,6455.97 4413.38,6453.19 4413.38,6452.78 4416.16,6450 4426.34,6450 4429.13,6452.78 4429.13,6453.19 4431.91,6455.97 4442.09,6455.97 4444.88,6453.19 4444.88,6452.78 4447.66,6450 4457.84,6450 4460.62,6452.78 4460.62,6453.19 4463.41,6455.97 4473.59,6455.97 4476.37,6453.19 4476.37,6452.78 4479.15,6450 4489.34,6450 4492.12,6452.78 4492.12,6453.19 4494.9,6455.97 4505.08,6455.97 4507.87,6453.19 4507.87,6452.78 4510.65,6450 4520.83,6450 4523.62,6452.78 4523.62,6453.19 4526.4,6455.97 4536.58,6455.97 4539.36,6453.19 4539.36,6452.78 4542.15,6450 4552.33,6450 4555.11,6452.78 4555.11,6453.19 4557.9,6455.97 4568.08,6455.97 4570.86,6453.19 4570.86,6452.78 4573.64,6450 4583.82,6450 4586.61,6452.78 4586.61,6453.19 4589.39,6455.97 4599.57,6455.97 4602.36,6453.19 4602.36,6452.78 4605.14,6450 4615.32,6450 4618.1,6452.78 4618.1,6453.19 4620.89,6455.97 4631.07,6455.97 4633.85,6453.19 4633.85,6452.78 4636.64,6450 4646.82,6450 4649.6,6452.78 4649.6,6453.19 4652.38,6455.97 4662.56,6455.97 4665.35,6453.19 4665.35,6452.78 4668.13,6450 4678.31,6450 4681.1,6452.78 4681.1,6453.19 4683.88,6455.97 4694.06,6455.97 4696.84,6453.19 4696.84,6452.78 4699.63,6450 4709.81,6450 4712.59,6452.78 4712.59,6453.19 4715.38,6455.97 4725.56,6455.97 4728.34,6453.19 4728.34,6452.78 4731.12,6450 4741.3,6450 4744.09,6452.78 4744.09,6453.19 4746.87,6455.97 4757.05,6455.97 4759.84,6453.19 4759.84,6452.78 4762.62,6450 4772.8,6450 4775.58,6452.78 4775.58,6453.19 4778.37,6455.97 4788.55,6455.97 4791.33,6453.19 4791.33,6452.78 4794.12,6450 4804.3,6450 4807.08,6452.78 4807.08,6453.19 4809.86,6455.97 4820.04,6455.97 4822.83,6453.19 4822.83,6452.78 4825.61,6450 4835.79,6450 4838.58,6452.78 4838.58,6453.19 4841.36,6455.97 4851.54,6455.97 4854.32,6453.19 4854.32,6452.78 4857.11,6450 4867.29,6450 4870.07,6452.78 4870.07,6453.19 4872.86,6455.97 4883.04,6455.97 4885.82,6453.19 4885.82,6452.78 4888.6,6450 4898.78,6450 4901.57,6452.78 4901.57,6453.19 4904.35,6455.97 4914.53,6455.97 4917.32,6453.19 4917.32,6452.78 4920.1,6450 4930.28,6450 4933.06,6452.78 4933.06,6453.19 4935.85,6455.97 4946.03,6455.97 4948.81,6453.19 4948.81,6452.78 4951.6,6450 4961.78,6450 4964.56,6452.78 4964.56,6453.19 4967.34,6455.97 4977.52,6455.97 4980.31,6453.19 4980.31,6452.78 4983.09,6450 4993.27,6450 4996.06,6452.78 4996.06,6453.19 4998.84,6455.97 5009.02,6455.97 5011.8,6453.19 5011.8,6452.78 5014.59,6450 5024.77,6450 5027.55,6452.78 5027.55,6453.19 5030.34,6455.97 5040.52,6455.97 5043.3,6453.19 5043.3,6452.78 5046.08,6450 5056.26,6450 5059.05,6452.78 5059.05,6453.19 5061.83,6455.97 5072.01,6455.97 5074.8,6453.19 5074.8,6452.78 5077.58,6450 5087.76,6450 5090.54,6452.78 5090.54,6453.19 5093.33,6455.97 5103.51,6455.97 5106.29,6453.19 5106.29,6452.78 5109.08,6450 5119.26,6450 5122.04,6452.78 5122.04,6453.19 5124.82,6455.97 5135,6455.97 5137.79,6453.19 5137.79,6452.78 5140.57,6450 5150.75,6450 5153.54,6452.78 5153.54,6453.19 5156.32,6455.97 5166.5,6455.97 5169.28,6453.19 5169.28,6452.78 5172.07,6450 5182.25,6450 5185.03,6452.78 5185.03,6453.19 5187.82,6455.97 5198,6455.97 5200.78,6453.19 5200.78,6452.78 5203.56,6450 5220,6450 5228.35,6441.65 5228.35,6437.71 5227.87,6437.23 5227.87,6433.3 5235.07,6426.1 5239.01,6426.1 5239.49,6426.58 5243.42,6426.58 5250.62,6419.38 5250.62,6415.44 5248.44,6413.26 5248.44,6409.32 5255.64,6402.12 5259.58,6402.12 5261.76,6404.3 5265.7,6404.3 5272.89,6397.11 5272.89,6393.17 5270.71,6390.99 5270.71,6387.05 5277.91,6379.85 5281.85,6379.85 5284.03,6382.03 5287.97,6382.03 5295.16,6374.84 5295.16,6370.9 5292.98,6368.72 5292.98,6364.78 5300.18,6357.58 5304.12,6357.58 5306.3,6359.76 5310.24,6359.76 5330.47,6339.53 5330.47,6339.21 5327.69,6336.43 5312.78,6336.43 5310,6333.64 5310,6323.46 5312.78,6320.68 5327.69,6320.68 5330.47,6317.9 5330.47,6307.72 5327.69,6304.93 5312.78,6304.93 5310,6302.15 5310,6291.97 5312.78,6289.18 5327.69,6289.18 5330.47,6286.4 5330.47,6276.22 5327.69,6273.44 5312.78,6273.44 5310,6270.65 5310,6260.47 5312.78,6257.69 5327.69,6257.69 5330.47,6254.9 5330.47,6244.72 5327.69,6241.94 5312.78,6241.94 5310,6239.16 5310,6228.98 5312.78,6226.19 5327.69,6226.19 5330.47,6223.41 U5.34@5330.47,6187.13
SD_A10: U1.T7 U5.22 | length 1774.7
  Top Layer w3.94: U1.T7@4147.76,5773.78 4376.54,5545 4563.96,5545 4566.74,5542.22 4566.74,5537.78 4569.53,5535 4579.71,5535 4582.49,5537.78 4582.49,5542.22 4585.28,5545 4595.46,5545 4598.24,5542.22 4598.24,5537.78 4601.02,5535 4611.2,5535 4613.99,5537.78 4613.99,5542.22 4616.77,5545 4626.95,5545 4629.74,5542.22 4629.74,5537.78 4632.52,5535 4642.7,5535 4645.48,5537.78 4645.48,5542.22 4648.27,5545 4658.45,5545 4661.23,5542.22 4661.23,5537.78 4664.02,5535 4674.2,5535 4676.98,5537.78 4676.98,5542.22 4679.76,5545 4689.94,5545 4692.73,5542.22 4692.73,5537.78 4695.51,5535 4705.69,5535 4708.48,5537.78 4708.48,5542.22 4711.26,5545 4721.44,5545 4724.22,5542.22 4724.22,5537.78 4727.01,5535 4737.19,5535 4739.97,5537.78 4739.97,5542.22 4742.76,5545 4752.94,5545 4755.72,5542.22 4755.72,5537.78 4758.5,5535 4768.68,5535 4771.47,5537.78 4771.47,5542.22 4774.25,5545 4784.43,5545 4787.22,5542.22 4787.22,5537.78 4790,5535 4800.18,5535 4802.96,5537.78 4802.96,5542.22 4805.75,5545 4815.93,5545 4818.71,5542.22 4818.71,5537.78 4821.5,5535 4831.68,5535 4834.46,5537.78 4834.46,5542.22 4837.24,5545 4847.42,5545 4850.21,5542.22 4850.21,5537.78 4852.99,5535 4863.17,5535 4865.96,5537.78 4865.96,5542.22 4868.74,5545 4878.92,5545 4881.7,5542.22 4881.7,5537.78 4884.49,5535 4894.67,5535 4897.45,5537.78 4897.45,5542.22 4900.24,5545 4910.42,5545 4913.2,5542.22 4913.2,5537.78 4915.98,5535 4926.16,5535 4928.95,5537.78 4928.95,5542.22 4931.73,5545 4941.91,5545 4944.7,5542.22 4944.7,5537.78 4947.48,5535 4957.66,5535 4960.44,5537.78 4960.44,5542.22 4963.23,5545 4973.41,5545 4976.19,5542.22 4976.19,5537.78 4978.98,5535 4989.16,5535 4991.94,5537.78 4991.94,5542.22 4994.72,5545 5004.9,5545 5007.69,5542.22 5007.69,5537.78 5010.47,5535 5020.65,5535 5023.44,5537.78 5023.44,5542.22 5026.22,5545 5036.4,5545 5039.18,5542.22 5039.18,5537.78 5041.97,5535 5052.15,5535 5054.93,5537.78 5054.93,5542.22 5057.72,5545 5067.9,5545 5070.68,5542.22 5070.68,5537.78 5073.46,5535 5083.64,5535 5086.43,5537.78 5086.43,5542.22 5089.21,5545 5099.39,5545 5102.18,5542.22 5102.18,5537.78 5104.96,5535 5115.14,5535 5117.92,5537.78 5117.92,5542.22 5120.71,5545 5130.89,5545 5133.67,5542.22 5133.67,5537.78 5136.46,5535 5146.64,5535 5149.42,5537.78 5149.42,5542.22 5152.2,5545 5162.39,5545 5165.17,5542.22 5165.17,5537.78 5167.95,5535 5178.13,5535 5180.92,5537.78 5180.92,5542.22 5183.7,5545 5193.88,5545 5196.66,5542.22 5196.66,5537.78 5199.45,5535 5209.63,5535 5212.41,5537.78 5212.41,5542.22 5215.2,5545 5225.38,5545 5228.16,5542.22 5228.16,5537.78 5230.94,5535 5241.13,5535 5243.91,5537.78 5243.91,5542.22 5246.69,5545 5256.87,5545 5259.66,5542.22 5259.66,5537.78 5262.44,5535 5272.62,5535 5275.41,5537.78 5275.41,5542.22 5278.19,5545 5290,5545 5361.97,5616.97 U5.22@5361.97,5742.87